# EAGLE board 6702194049_Muhammad Farhan Qolbuna_D3TK-43-02_Sistem Minimum (EAGLE 9.6.2)

Size 100 x 80 mm. Coordinates in mm from the lower left corner, seen from the top.
Outline: 0,0 100,0 100,80 0,80 0,0
Copper layers (1*16): Top 0.035mm / dielectric 1.5mm / Bottom 0.035mm
Design rules "default": minimum track width 6mil, minimum drill 0.35mm, track to track 6mil, track to pad 6mil, pad to pad 6mil, via to via 6mil, smd to smd 6mil, copper to edge 40mil, drill to drill 6mil, minimum pad ring 10mil, minimum via ring 8mil, stop-mask expansion 4mil, vias tented up to drill 0mil, thermal gap 10mil

## Footprints (pad centres in the part's own frame; a part is rotated, then mirrored left to right if it is on the bottom)
CAPRD550W60D1025H1250B = drill 0.8 pad 1.4: 1 -2.75,0; 2 2.75,0
CAPC1005X60 = smd 0.56 x 0.629: 1 -0.485,0; 2 0.485,0
CON10 = drill 0.914: 1 -5.08,-1.27 | drill 0.914 octagon: 2 -5.08,1.27; 3 -2.54,-1.27; 4 -2.54,1.27; 5 0,-1.27; 6 0,1.27; 7 2.54,-1.27; 8 2.54,1.27; 9 5.08,-1.27; 10 5.08,1.27
DIL28-3 = drill 0.813 long: 1 -16.51,-3.81; 2 -13.97,-3.81; 3 -11.43,-3.81; 4 -8.89,-3.81; 5 -6.35,-3.81; 6 -3.81,-3.81; 7 -1.27,-3.81; 8 1.27,-3.81; 9 3.81,-3.81; 10 6.35,-3.81; 11 8.89,-3.81; 12 11.43,-3.81; 13 13.97,-3.81; 14 16.51,-3.81; 15 16.51,3.81; 16 13.97,3.81; 17 11.43,3.81; 18 8.89,3.81; 19 6.35,3.81; 20 3.81,3.81; 21 1.27,3.81; 22 -1.27,3.81; 23 -3.81,3.81; 24 -6.35,3.81; 25 -8.89,3.81; 26 -11.43,3.81; 27 -13.97,3.81; 28 -16.51,3.81
TO220H = drill 1.118 long: 1 -2.54,-10.16; 2 0,-10.16; 3 2.54,-10.16 | hole 3.302: 0,4.826
DCJ0202 = drill 1 pad 2 long: 1 0,3.1; 2 4.8,0; 3 0,-3
1X06 = drill 1.016 octagon: 1 -6.35,0; 2 -3.81,0; 3 -1.27,0; 4 1.27,0; 5 3.81,0; 6 6.35,0
1X05 = drill 1.016 long: 1 -5.08,0; 2 -2.54,0; 3 0,0; 4 2.54,0; 5 5.08,0
1X09-BIG = drill 1.016 pad 1.778 octagon: 1 -10.16,0; 2 -7.62,0; 3 -5.08,0; 4 -2.54,0; 5 0,0; 6 2.54,0; 7 5.08,0; 8 7.62,0; 9 10.16,0
1X06' = drill 1.016 long: 1 -6.35,0; 2 -3.81,0; 3 -1.27,0; 4 1.27,0; 5 3.81,0; 6 6.35,0
P47F-BOTTOM = smd 2.6 x 2.6: A -2.45,0; C 2.45,0 | hole 2.3: 0,0
86SMX = smd 2.286 x 2.184: 1 -5.08,-2.286; 4 -5.08,2.286 | smd 3.556 x 2.184: 2 4.318,-2.286; 3 4.318,2.286
DT6 = drill 1.118 octagon: 1 -2.54,2.54; 2 2.54,2.54; 3 2.54,-2.54; 4 -2.54,-2.54

## Placement (x,y rotation side)
C1  [CAPRD550W60D1025H1250B]  -59.69,-24.13 0 top  (outside the outline)
C2  [CAPRD550W60D1025H1250B]  -71.12,-24.13 0 top  (outside the outline)
C3  [CAPC1005X60]  -125.73,-161.29 0 top  (outside the outline)
CON2  [CON10]  -96.52,-110.49 0 top  (outside the outline)
IC1  MEGA8-P  [DIL28-3]  -101.6,-143.51 0 top  (outside the outline)
IC2  7805T  [TO220H]  -85.09,-77.47 0 top  (outside the outline)
J1  DCJ0202  [DCJ0202]  -99.06,-78.74 0 top  (outside the outline)
JP1  [1X06]  -67.31,-36.83 0 top  (outside the outline)
JP2  PINHD-1X5  [1X05]  -68.58,-71.12 0 top  (outside the outline)
JP3  [1X09-BIG]  -64.77,-53.34 0 top  (outside the outline)
JP4  PINHD-1X6  [1X06']  -67.31,-78.74 0 top  (outside the outline)
JP5  PINHD-1X6  [1X06']  -67.31,-86.36 0 top  (outside the outline)
LED1  LAP4-BOTTOM  [P47F-BOTTOM]  -22.86,45.72 0 top  (outside the outline)
LED2  LAP4-BOTTOM  [P47F-BOTTOM]  -36.83,45.72 0 top  (outside the outline)
Q1  [86SMX]  -123.19,-153.67 0 top  (outside the outline)
S1  DT6  [DT6]  -137.16,-153.67 0 top  (outside the outline)

## Library data of the parts
C1-C3 = Capacitor; CATEGORY: Capacitor
CON2 = con-harting; OC_FARNELL: unknown; OC_NEWARK: unknown
IC1 = atmel; OC_FARNELL: unknown; OC_NEWARK: unknown
IC2 JP1 JP3 = adafruit
J1 = con-jack; OC_FARNELL: unknown; OC_NEWARK: unknown
JP2 JP4 JP5 = Connector; CATEGORY: CONNECTOR; SUB-CATEGORY: PIN-HEADER
LED1 LED2 = led
Q1 = adafruit; OC_FARNELL: 6344860; OC_NEWARK: unknown
S1 = switch-misc

## Nets
+12V: IC2.1 J1.1
GND: C1.2 C2.2 CON2.8 CON2.10 IC1.8 IC1.22 IC2.2 J1.2 J1.3 JP5.1 JP5.2 JP5.3 JP5.4 JP5.5 JP5.6 LED1.C
N$1: LED1.A
N$2: LED2.A
N$3: IC1.23 JP1.1
N$4: IC1.24 JP1.2
N$5: IC1.25 JP1.3
N$6: IC1.26 JP1.4
N$7: IC1.27 JP1.5
N$8: IC1.28 JP1.6
N$9: IC1.2 JP3.1
N$10: IC1.3 JP3.2
N$11: IC1.4 JP3.3
N$12: IC1.5 JP3.4
N$13: IC1.6 JP3.5
N$14: IC1.11 JP3.6
N$15: IC1.12 JP3.7
N$16: IC1.13 JP3.8
N$17: IC1.14 JP3.9
N$18: IC1.15 JP2.1
N$19: IC1.16 JP2.2
N$20: LED2.C
N$21: CON2.9 IC1.18 JP2.4
N$22: CON2.7 IC1.19 JP2.5
N$23: CON2.1 IC1.17 JP2.3
N$25: C3.2 CON2.5 IC1.1 S1.1 S1.2
N$26: C2.1 Q1.1
N$27: CON2.2 CON2.4
N$28: C1.1 IC1.9 IC1.10 Q1.4
N$29: C3.1 S1.3 S1.4
VCC: IC1.7 IC1.20 IC1.21 IC2.3 JP4.1 JP4.2 JP4.3 JP4.4 JP4.5 JP4.6

## Tracks (layer width: path | path; a pad name or v marks a point on that pad's centre or on a via)
+12V  (1 unrouted)
GND  (15 unrouted)
N$3  (1 unrouted)
N$4  (1 unrouted)
N$5  (1 unrouted)
N$6  (1 unrouted)
N$7  (1 unrouted)
N$8  (1 unrouted)
N$9  (1 unrouted)
N$10  (1 unrouted)
N$11  (1 unrouted)
N$12  (1 unrouted)
N$13  (1 unrouted)
N$14  (1 unrouted)
N$15  (1 unrouted)
N$16  (1 unrouted)
N$17  (1 unrouted)
N$18  (1 unrouted)
N$19  (1 unrouted)
N$21  (2 unrouted)
N$22  (2 unrouted)
N$23  (2 unrouted)
N$25  (4 unrouted)
N$26  (1 unrouted)
N$27  (1 unrouted)
N$28  (3 unrouted)
N$29  (2 unrouted)
VCC  (9 unrouted)